# Altium PCB AVR-Connect.PcbDoc
Units mil, origin at the board's own origin, x right, y up, seen from the top; angles counter-clockwise.
Board outline 6000 x 4000 mil, 2 copper layers (Top Layer, Bottom Layer); 52 components, 46 nets, 218 pads, 42 vias.
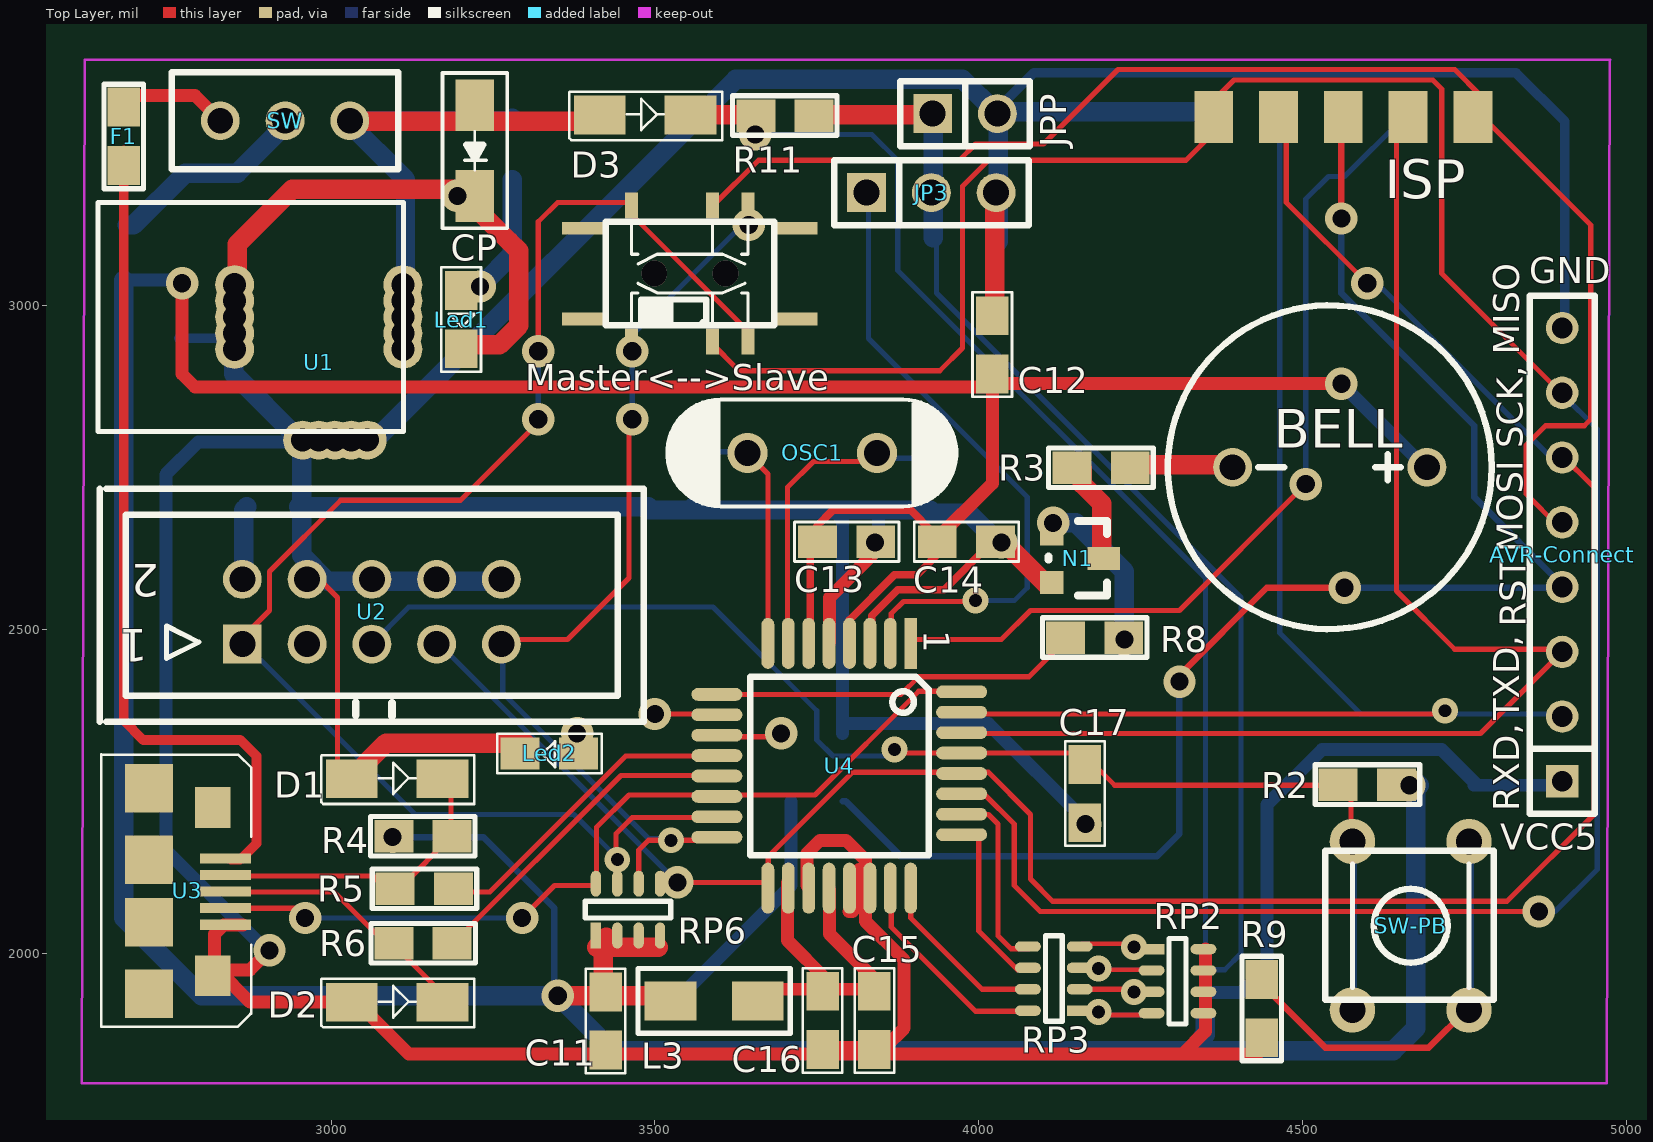
[diagram p0: Top Layer view]
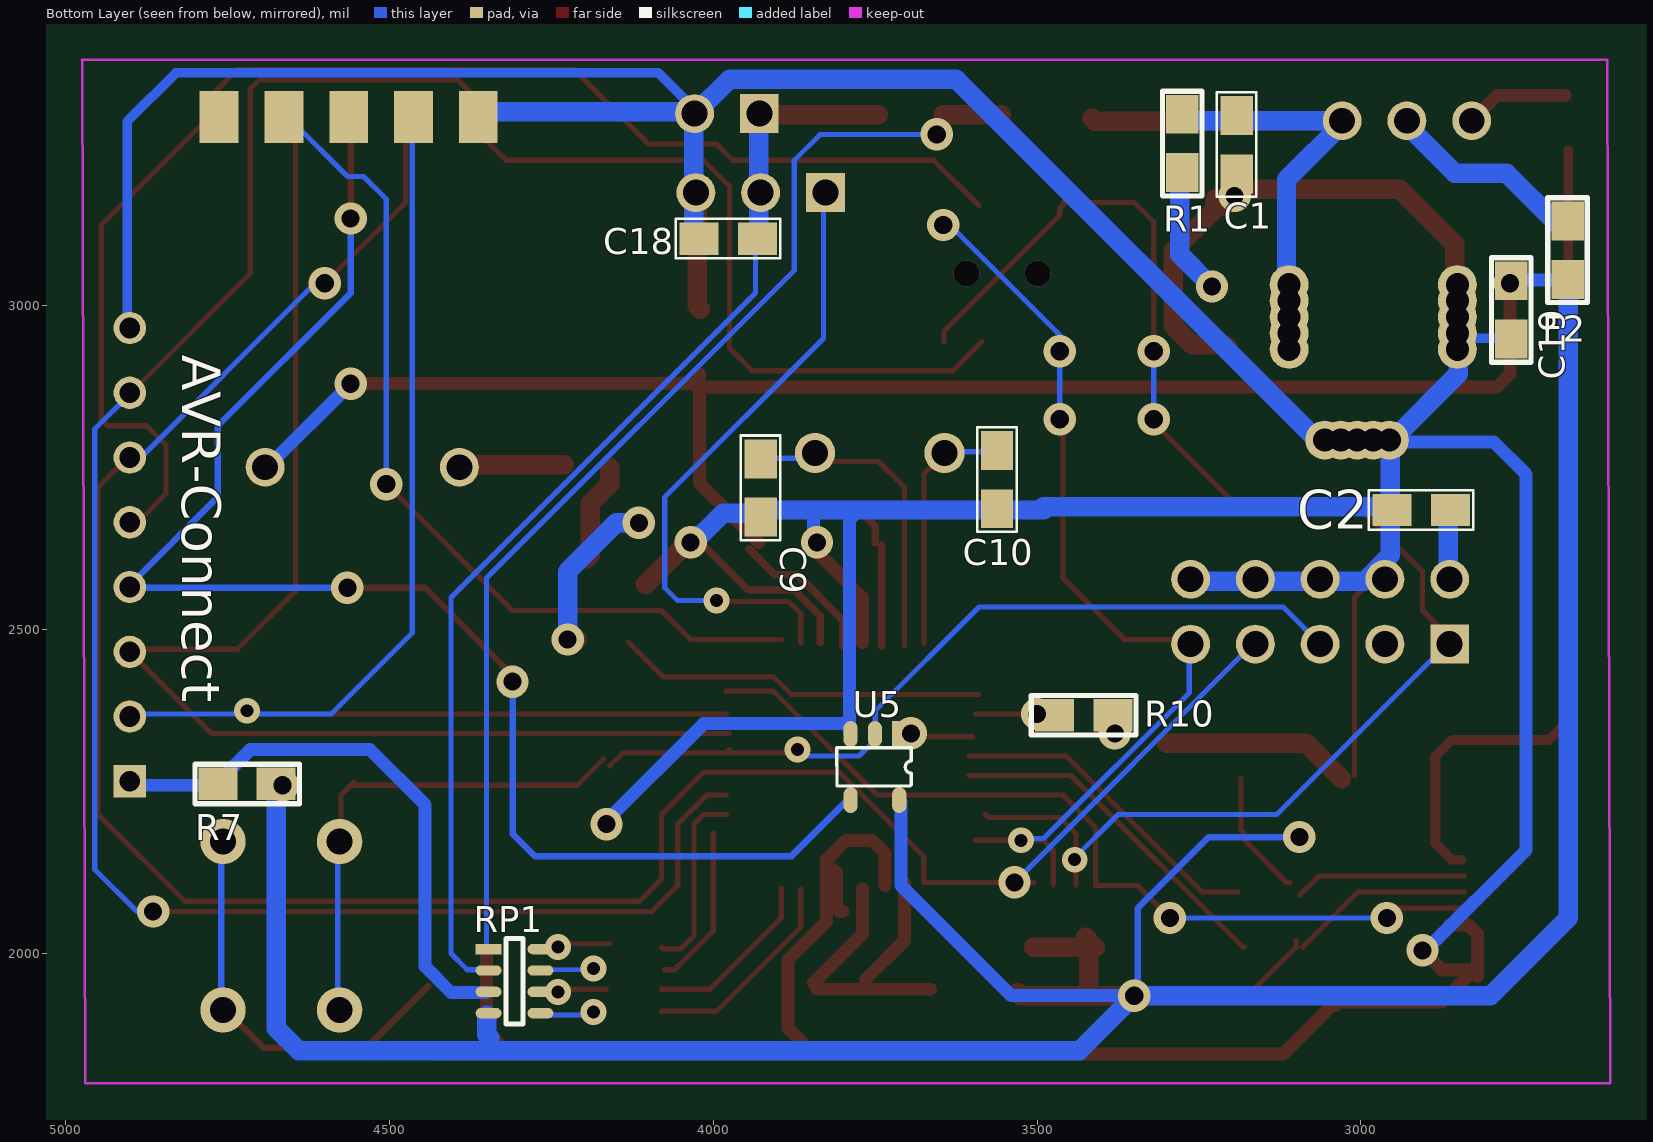
[diagram p1: Bottom Layer view, seen from below]

## Layer stack, top to bottom
Top Layer: signal copper 1.4
Dielectric: dielectric 12.6, FR-4, Dk 4.8
Bottom Layer: signal copper 1.4

## Board outline
1000,1000 7000,1000 7000,5000 1000,5000

## Design rules (kind name [scope] priority, off if disabled: settings)
Clearance [All] p1: gap=8
ComponentClearance [All] p1: gap=10 collisioncheckmode=3 verticalgap=10
PolygonConnect [All] p1: connectstyle=Relief reliefconductorwidth=10 reliefentries=4 polygonreliefangle="90 Angle"
RoutingVias [All] p1: holewidth=20 width=40 viastyle="Through Hole" minholewidth=20 minwidth=40 maxholewidth=28 maxwidth=50
SolderMaskExpansion [All] p1: expansion=4
TestPointUsage [All] p1: valid=0 allowmultiple=FALSE
Testpoint [All] p1: side=15 testpointundercomponent=TRUE minsize=40 maxsize=100 preferedsize=60 minholesize=0 maxholesize=40 preferedholesize=32 testpointgrid=1 style=1023 order=0123456789
Width [All] p1: maxlimit=40 minlimit=6 preferedwidth=10 toplayer_prefwidth=8 bottomlayer_prefwidth=8 minimp=50.000000 maximp=50.000000 favimp=50.000000
18 further rules are at their usual default settings.

## Components (designator, comment, footprint, x,y, rotation, side; value= is the part's Value field where it differs from the comment)
AVR-Connect "8PIN" SIP8 4901,2266 r90 top
BELL "BELL" Bell 4692,2751 r180 top
C1 "0.1u" RC100 3202,3214 r90 bottom
C2 "0.1u" RC100 2872,2675 r0 bottom
C9 "22pf" RC100 3937,2684 r90 bottom
C10 "22pf" RC100 3572,2697 r90 bottom
C11 "10u" RC100 3434,1931 r270 top
C12 "0.1u" RC100 4011,2905 r90 top
C13 "0.1u" RC100 3761,2646 r0 top
C14 "10u" RC100 3946,2646 r0 top
C15 "0.1u" RC100 3849,1932 r270 top
C16 "0.1u" RC100 3769,1932 r270 top
C17 "CAPA" RC100 4154,2212 r90 top
C18 "0.1u" RC100 3942,3094 r0 bottom
C19 "10u" 0805 2763,2989 r90 bottom
CP "100u" CP+140 3222,3310 r270 top
D1 "3.6V" DC140 3172,2181 r180 top
D2 "3.6V" DC140 3172,1836 r180 top
D3 "4148" DC140 3555,3206 r180 top
F1 "350mA" 0805 2685,3257 r90 top
F2 "FUSE" 0805 2686,3091 r270 bottom
ISP "SPI" DOWNLOAD-RC 4866,3390 r0 top
JP3 "3PIN" SIP3 3827,3175 r0 top
JPP "2PIN" SIP2 3929,3297 r0 top
L3 "LH" 1206 3524,1927 r0 top
Led1 "LED" LED 3286,2974 r270 top
Led2 "LED" LED 3332,2224 r180 top
Master<-->Slave "SW-DPDT" SW-DPDT 3589,3155 r180 top
N1 "NPN-A" SOT-23A 4113,2648 r270 top
OSC1 "12MHz" OSC200 3643,2773 r180 top
R1 "2K" 0805 3271,3246 r90 bottom
R2 "10K" 0805 4605,2266 r180 top
R3 "RES2A" 0805 4184,2745 r0 top
R4 "2.2K" 0805 3137,2176 r0 top
R5 "68" 0805 3149,2105 r180 top
R6 "68" 0805 3147,2021 r180 top
R7 "1" 0805 4715,2267 r0 bottom
R8 "RES2A" 0805 4184,2493 r180 top
R9 "RES2A" 0805 4432,1920 r270 top
R10 "RES2A" 0805 3433,2363 r180 bottom
R11 "1" 0805 3696,3289 r0 top
RP1 "RESPACK4" RN4 4347,2007 r180 bottom
RP2 "RESPACK4" RN4 4267,2007 r0 top
RP3 "RESPACK4" RN4 4156,1912 r180 top
RP6 "10K" RN4 3409,2028 r90 top
SW "SW-SPDT" SW-SPDT 2929,3286 r0 top
SW-PB "SW-PB" SW-PB 4577,2173 r0 top
U1 "POWER" POWER-L 3111,2983 r90 top
U2 "DOWNLOAD_SPI" DOWNLOAD 2863,2478 r180 top
U3 "USB-MICRO" USB-MICRO-R 2837,2147 r270 top
U4 "ATMEGA8_TQFP32" TQFP-32 3895,2479 r270 top
U5 "74AHCIG08" SOP-5 3713,2339 r270 bottom

## Footprints (in the part's own frame and the unit in brackets; to place one, negate y for a bottom-side part, rotate by r counter-clockwise, add the part's x,y. Pads: shape width x height; smd on the part's side, far side on the other; paste and mask are expansions set on the pad)
0805 [mil]
  rect 60x50 smd: 1(50,5) 2(-40,5)
  silkscreen extent -76,-26 85,36
1206 [mil]
  rect 80x60 smd: 1(0,0) 2(135,0)
  silkscreen extent -50,-50 185,50
Bell [mil]
  round 60 hole 40: 1(0,0) 2(300,0)
  silkscreen extent -100,-250 400,250
CP+140 [mil]
  rect 80x60 smd: 1(0,0) 2(140,0)
  silkscreen extent -50,-50 190,50
DC140 [mil]
  rect 80x60 smd: A(140,-89) K(0,-89)
  silkscreen extent -49,-125 187,-50
DOWNLOAD [mil]
  rect 60x60 hole 40: 1(0,0)
  round 60 hole 40: 2(0,-100) 3(-100,0) 4(-100,-100) 5(-200,0) 6(-200,-100) 7(-300,0) 8(-300,-100) 9(-400,0) 10(-400,-100)
  silkscreen extent -620,-240 220,120
DOWNLOAD-RC [mil]
  rect 60x80 smd: 1(-103,-98) 3(-203,-98) 5(-303,-98) 7(-403,-98) 9(-503,-98)
  rect 60x80 smd far side: 2(-103,-98) 4(-203,-98) 6(-303,-98) 8(-403,-98) 10(-503,-98)
LED [mil]
  rect 60x50 smd: A(-50,-85) K(40,-85)
  silkscreen extent -86,-116 75,-54
OSC200 [mil]
  round 62 hole 40: 1(0,0) 2(-200,0)
  silkscreen extent -323,-83 124,83
POWER-L [mil]
  round 60 hole 36: 1(-50,0) 1(-25,0) 1(0,0) 1(25,0) 1(50,0) 2(-190,55) 2(-190,80) 2(-190,105) 2(-190,130) 2(-190,155) 2(-50,260) 2(-25,260) 2(0,260) 2(25,260) 2(50,260)
  silkscreen extent -177,-1 177,471
RC100 [mil]
  rect 60x50 smd: 1(-10,-10) 2(80,-10)
  silkscreen extent -45,-41 116,21
RN4 [mil]
  rect 40x16 smd: 1(0,0)
  oval 40x16 smd: 2(0,-33) 3(0,-66) 4(0,-99) 5(80,-99) 6(80,-66) 7(80,-33) 8(80,0)
  silkscreen extent 27,-116 53,16
SIP2 [mil]
  rect 60x60 hole 40: 1(0,0)
  round 60 hole 40: 2(100,0)
  silkscreen extent -50,-50 150,50
SIP3 [mil]
  rect 60x60 hole 40: 1(0,0)
  round 60 hole 40: 2(100,0) 3(200,0)
  silkscreen extent -50,-50 250,50
SIP8 [mil]
  rect 50x50 hole 32: 1(0,0)
  round 50 hole 32: 2(100,0) 3(200,0) 4(300,0) 5(400,0) 6(500,0) 7(600,0) 8(700,0)
  silkscreen extent -50,-50 750,50
SOP-5 [mil]
  rect 40x22 smd: 1(0,0)
  oval 40x22 smd: 2(0,-37.5) 3(0,-75) 4(102,-75) 5(102,0)
  silkscreen extent 21,-96 80,19
SOT-23A [mil]
  rect 36x36 smd: B(0,0) E(75,0)
  rect 36x50 smd: C(38,80)
  silkscreen extent -20,-5 95,85
SW-DPDT [mil]
  rect 65x20 smd: 0(-130,175) 0(-130,35) 0(200,175) 0(200,35)
  rect 20x40 smd: 1(0,0) 2(-55,0) 3(125,0) 4(0,210) 5(-55,210) 6(125,210)
  silkscreen extent -95,25 165,185
SW-PB [mil]
  round 70 hole 40: 1(0,0) 2(180,0) 3(0,-260) 4(180,-260)
  silkscreen extent -42,-244 218,-14
SW-SPDT [mil]
  round 60 hole 40: 1(-100,0) 2(0,0) 3(100,0)
  silkscreen extent -175,-75 175,75
TQFP-32 [mm]
  rect 2x0.5 smd: 1(0,0)
  oval 2x0.5 smd: 2(0,-0.8) 3(0,-1.6) 4(0,-2.4) 5(0,-3.2) 6(0,-4) 7(0,-4.8) 8(0,-5.6) 17(9.6,-5.6) 18(9.6,-4.8) 19(9.6,-4) 20(9.6,-3.2) 21(9.6,-2.4) 22(9.6,-1.6) 23(9.6,-0.8) 24(9.6,0)
  oval 0.5x2 smd: 9(2,-7.6) 10(2.8,-7.6) 11(3.6,-7.6) 12(4.4,-7.6) 13(5.2,-7.6) 14(6,-7.6) 15(6.8,-7.6) 16(7.6,-7.6) 25(7.5,2) 26(6.7,2) 27(5.9,2) 28(5.1,2) 29(4.3,2) 30(3.5,2) 31(2.7,2) 32(1.9,2)
  silkscreen extent 1.3,-6.3 8.3,0.7
USB-MICRO-R [mm]
  rect 0.4x2 smd: 1(0,0) 2(0.65,0) 3(1.3,0) 4(1.95,0) 5(2.6,0)
  rect 1.6x1.4 smd: 6(4.6,-0.5) 11(-2,-0.5)
  rect 1.9x1.9 smd: 7(5.3,-3) 8(2.5,-3) 9(0.05,-3) 10(-2.75,-3)
  silkscreen extent -4.09,-4.88 6.6,1.02

## Part data
C1 C2 C9 C10 C11 C12 C13 C14 C15 C16 C18 C19: library part CAPA
CP: library part CAP+
D1 D2 D3: library part DIODE
F1: library part FUSE
OSC1: library part CRYSTAL
R1 R2 R4 R5 R6 R7 R11: library part RES2A
RP6: library part RESPACK4
U4: "Atmel Microcontroller - Library created by carel..  <www.mpfreezone.com>"

## Via types
v1: diameter 50, hole 28, Top Layer to Bottom Layer, 31 vias
v2: diameter 40, hole 20, Top Layer to Bottom Layer, 9 vias
v3: diameter 40, hole 40, Top Layer to Bottom Layer, 2 vias

## Nets (pads, with @x,y where several pads share a name; then routed paths per layer and width w, separated by ;. In a path a pad name is that pad's centre, name@x,y a point inside that pad or via, vN(x,y) a via of type N, cw(c..) or ccw(c..) an arc to the next point about the centre after c; other vN are vias at no path point)
ADR3: ISP.4 U4.1 | length 1347.7
  Top Layer w8: U4.1@3895,2485 4035,2485 4080,2530 4310,2530 v1@4502.5,2722.5
  Bottom Layer w8: v1(4505,2725) 4505,3165 4540,3200 4565,3200 ISP.4@4655,3290
AVCC: C15.1 C16.1 L3.2 U4.18 U4.20 | length 525.9
  Top Layer w20: L3.2@3665,1945 C15.1@3840,1945 ; U4.18@3705,2110 3705,2020 C16.1@3765,1960 ; U4.20@3770,2100 3770,2030 C15.1@3845,1955
BELL: R8.1 U4.9 | length 573.1
  Top Layer w8: U4.9@3590,2400 3879.75,2400 3907.38,2427.63 4077.63,2427.63 R8.1@4130,2480
D1+: R6.2 U4.13 | length 534.8
  Top Layer w8: R6.2@3180,2010 3182.63,2010 3447.63,2275 U4.13@3605,2275
D1-: R5.2 U4.12 | length 502
  Top Layer w8: R5.2@3190,2095 3245,2095 3455,2305 U4.12@3605,2305
GND: AVR-Connect.8 C1.1 C2.2 C9.1 C10.1 C11.2 C12.2 C13.2 C14.2 C15.2 C16.2 C17.1 C18.2 C19.2 CP.2 D1.A D2.A ISP.10 JP3.3 JPP.2 Led1.K Led2.K N1.E R9.1 RP2.5 RP2.6 RP2.7 RP2.8 U1.2 U2.4 U2.6 U2.8 U2.10 U3.5 U3.6 U4.3 U4.5 U4.19 U4.21 U4.22 U5.3 | length 11864.1
  Top Layer w8: U2.4@2975,2585 3010,2550 D1.A@3010,2275
  Top Layer w12: U4.3@3835,2480 3835,2521.72 3875,2561.72 3946.72,2561.72 C14.2@4020,2635
  Top Layer w20: U3.6@2820,1965 2820,2030 2834.35,2044.35 U3.5@2864.35,2044.35 ; U3.6@2820,1975 2875,1975 v1@2900,2000 ; U3.6@2825,1975 2875,1925 D2.A@3035,1925 ; D2.A@3040,1920 3045,1920 3120,1845 4430,1845 R9.1@4435,1850 ; U4.19@3735,2105 3735,2155 3755,2175 3795,2175 3825,2145 3825,2050 3885,1990 3885,1885 3855,1855 3760,1855 C16.2@3755,1850 ; U4.5@3770,2480 3770,2550 C13.2@3845,2625 ; U4.21@3800,2065 3805,2065 3810,2070 3810,2125 3815,2130 ; 4315,1845 4350,1880 RP2.8@4350,2007
  Top Layer w30: U1.2@2850,2940 2855,2945 2855,3095 2940,3180 3190,3180 CP.2@3205,3165 ; D1.A@3030,2270 3085,2325 Led2.K@3300,2325 ; Led1.K@3205,2935 3210,2940 3260,2940 3290,2970 3290,3085 3275,3100 3225,3150 CP.2@3225,3165 ; CP.2@3210,3155 CP.2@3215,3160 ; C12.2@4020,2995 4025,3000 JP3.3@4025,3175 ; C14.2@4030,2635 4040,2635 N1.E@4105,2570
  Bottom Layer w15: C19.2@2765,2950 U1.2@2845,2950 ; JPP.2@4025,3300 4085,3360 4830,3360 4905,3285 AVR-Connect.8@4905,2965
  Bottom Layer w20: v1@2900,2005 2745,2160 2745,2740 2795,2790 U1.2@2955,2790 ; 3775,2685 3790,2670 U5.3@3790,2340 ; U5.3@3790,2355 4015,2355 v1@4165,2205 ; 3835,2685 3845,2675 v1@3845,2635 ; v1@4160,2200 v1@4165,2195
  Bottom Layer w30: U1.2@2850,3035 2850,2895 U1.2@2950,2795 ; C2.2@2950,2690 3490,2690 ; U1.2@2955,2795 2955,2615 2995,2575 U2.10@3265,2575 ; U1.2@3010,2790 3065,2790 3625,3350 3975,3350 JPP.2@4025,3300 ; 3490,2685 3925,2685 C9.1@3930,2680 ; C10.1@3560,2690 C10.1@3565,2685 ; C9.1@3925,2680 3985,2680 v1@4035,2630 ; C18.2@4030,3100 JPP.2@4030,3310 ; JPP.2@4030,3300 ISP.10@4360,3300
  other v1: 2905,2005 4165,2200 3840,2635 4035,2635 3195,3170
LED: R10.2 U4.10 | length 97.1
  Top Layer w8: v1@3500,2375 3505,2370 U4.10@3595,2370
  other v1: 3500,2370
MISO: Master<-->Slave.2 Master<-->Slave.6 RP6.6 U2.9 U4.16 | length 1486.3
  Top Layer w6: RP6.6@3475,2105 RP6.6@3475,2110
  Top Layer w8: U2.9@3260,2485 3365,2485 3460,2580 3460,2830 v1@3465,2835 ; Master<-->Slave.6@3460,2945 Master<-->Slave.6@3464,2941 ; RP6.6@3475,2110 3475,2160 3490,2175 U4.16@3595,2175
  Bottom Layer w8: U2.9@3265,2475 3265,2402.63 3490,2177.63 v2@3525,2177.63 ; v1(3465,2825) 3465,2955 v1@3640,3130
  other v1: 3465,2930 3645,3125
  other v2: 3525,2175
MOSI: Master<-->Slave.3 Master<-->Slave.5 RP6.7 U2.1 U4.15 | length 2339.5
  Top Layer w8: U2.1@2865,2480 2865,2490 2905,2530 2905,2590 3015,2700 3200,2700 v1@3325,2825 ; v1(3320,2930) 3320,3130 3350,3160 Master<-->Slave.3@3460,3160 ; RP6.7@3440,2105 3440,2185 3465,2210 3575,2210 U4.15@3580,2215 ; Master<-->Slave.3@3460,3155 3465,3150 3465,3140 3644,2961 Master<-->Slave.5
  Bottom Layer w8: U2.1@2865,2475 2870,2475 3130,2215 3375,2215 v2@3443.5,2146.5 ; v1(3320,2825) v1@3320,2935
  other v2: 3442,2145
MOTOR: JP3.1 U4.2 | length 989.6
  Top Layer w8: U4.2@3865,2480 3865,2525 3883.72,2543.72 v2@3995,2543.72
  Bottom Layer w8: JP3.1@3830,3170 3830,2950 4075,2705 4075,2565 4055,2545 3990,2545 v2@3985,2550
  other v2: 3995,2545
NetBELL_2: BELL.2 R3.1 | length 155
  Top Layer w30: R3.1@4230,2755 BELL.2@4385,2755
NetC2_1: C2.1 U2.2 | length 112.1
  Bottom Layer w30: U2.2@2865,2580 2865,2685 C2.1@2870,2690
NetC9_2: C9.2 OSC1.2 U4.7 | length 483.6
  Top Layer w8: U4.7@3705,2475 3705,2720 3745,2760 3835,2760 OSC1.2@3840,2765
  Bottom Layer w8: OSC1.2@3845,2765 C9.2@3930,2765
NetC10_2: C10.2 OSC1.1 U4.8 | length 397.4
  Top Layer w8: OSC1.1@3640,2775 3674.53,2740.47 U4.8
  Bottom Layer w8: C10.2@3555,2780 3560,2775 OSC1.1@3640,2775
NetD1_K: D1.K R4.1 R5.1 U3.2 | length 451.4
  Top Layer w8: U3.2@2840,2120 3065,2120 R5.1@3095,2090 ; R5.1@3110,2110 3115,2110 R4.1@3180,2175 ; R4.1@3180,2185 3185,2190 D1.K@3185,2270
NetD2_K: D2.K R6.1 U3.3 | length 401.3
  Top Layer w8: U3.3@2840,2095 3005,2095 R6.1@3090,2010 ; R6.1@3100,2020 3100,2010 D2.K@3175,1935
NetF1_2: F1.2 U3.1 | length 1293.1
  Top Layer w15: F1.2@2680,3240 2680,2360 2710,2330 2860,2330 2885,2305 2885,2170 2860,2145 U3.1@2845,2145
NetF2_2: F2.2 SW.2 | length 309.2
  Bottom Layer w30: F2.2@2685,3125 2695,3125 2775,3205 2855,3205 SW.2@2930,3280
NetLed1_A: Led1.A R1.2 | length 178.6
  Bottom Layer w30: v1@3235,3035 3280,3080 R1.2@3280,3195
  other v1: 3230,3030
NetLed2_A: Led2.A R10.1
  other v1: 3380,2340
NetN1_B: N1.B R8.2 | length 248.1
  Top Layer w30: R8.2@4210,2485 R8.2@4215,2480
  Bottom Layer w30: v1(4115,2665) 4150,2665 4225,2590 v1@4225,2490
  other v1: 4225,2485
NetN1_C: N1.C R3.2 | length 154.5
  Top Layer w30: R3.2@4160,2750 4160,2725 4190,2695 4190,2615 N1.C@4195,2610
NetR9_2: R9.2 SW-PB.2 SW-PB.4 | length 631.3
  Top Layer w10: R9.2@4440,1950 4535,1855 4695,1855 SW-PB.4@4755,1915
  Bottom Layer w10: SW-PB.2@4760,2170 4760,1925 SW-PB.4@4765,1920
NRST: C17.2 R2.1 SW-PB.1 SW-PB.3 U2.5 U4.29 U5.2 | length 2026.7
  Top Layer w8: U2.5@3065,2470 U2.5@3065,2480 ; v2@3875,2310 U4.29@3975,2310 ; U4.29@3975,2315 3980,2310 4140,2310 C17.2@4160,2290 ; C17.2@4170,2300 4210,2260 R2.1@4555,2260 ; R2.1@4555,2265 4575,2245 SW-PB.1@4575,2170
  Bottom Layer w8: U2.5@3060,2475 3120,2535 3590,2535 3750,2375 3750,2330 3775,2305 v2@3865,2305 ; SW-PB.3@4580,1910 SW-PB.1@4580,2175
  other v2: 3870,2315
RESET: U4.11 U5.1 | length 85
  Top Layer w8: U4.11@3600,2335 v1@3685,2335
  other v1: 3695,2340
RXD: AVR-Connect.2 ISP.8 U4.31 | length 2018.8
  Top Layer w8: U4.31@3980,2370 v2@4720,2370
  Bottom Layer w8: ISP.8@4465,3280 4465,2495 4590,2370 4900,2370 AVR-Connect.2@4905,2365
  other v2: 4720,2375
S1: RP1.8 RP2.1 RP3.4 | length 75
  Top Layer w7: RP3.4@4160,2015 v2@4235,2015
  other v2: 4240,2010
S2: RP1.7 RP2.2 RP3.3 | length 165
  Top Layer w7: v2@4185,1975 RP2.2@4270,1975
  Bottom Layer w7: v2@4185,1975 RP1.7@4265,1975
  other v2: 4185,1977
S3: RP1.6 RP2.3 RP3.2 | length 75
  Top Layer w8: RP3.2@4165,1945 v2@4240,1945
  other v2: 4240,1941
S4: RP1.5 RP2.4 RP3.1 | length 155
  Top Layer w8: v2@4195,1905 RP2.4@4270,1905
  Bottom Layer w8: v2@4190,1905 RP1.5@4270,1905
  other v2: 4185,1910
SAMP1: RP3.8 U4.23 | length 328.2
  Top Layer w8: U4.23@3865,2100 3865,2041.11 3995,1911.11 4078.89,1911.11 RP3.8@4080,1910
SAMP2: RP3.7 U4.24 | length 276.6
  Top Layer w8: U4.24 3895,2055 4005,1945 RP3.7@4080,1945
SAMP3: RP3.6 U4.25 | length 249.9
  Top Layer w8: U4.25@4000,2185 4000,2035 4060,1975 RP3.6@4075,1975
SAMP4: RP3.5 U4.26 | length 287.9
  Top Layer w8: U4.26@3980,2215 4015,2215 4030,2200 4030,2027.63 4050,2007.63 4077.63,2007.63 RP3.5@4080,2010
SCK: AVR-Connect.6 ISP.7 RP6.5 U2.7 U4.17 U4.28 | length 3547.8
  Top Layer w8: RP6.5@3505,2110 3675,2110 3675,2150 3805,2280 4015,2280 4080,2215 4080,2115 4114,2081 4816,2081 4950,2215 4950,2720 AVR-Connect.6@4900,2770 ; ISP.7@4475,3285 4475,3160 v1(4600,3035) ; v1@4604.68,3023.21 v1@4604.78,3028.12
  Bottom Layer w8: U2.7@3160,2480 3165,2480 v1(3535,2110) ; v1@4600,3030 4620,3030 AVR-Connect.6@4890,2760
TMISO: AVR-Connect.7 ISP.9 Master<-->Slave.4 U4.27 | length 3909.8
  Top Layer w8: Master<-->Slave.4@3585,2945 3630,2900 3940,2900 3975,2935 3975,3185 4015,3225 4320,3225 ISP.9@4365,3270 ; U4.27@3980,2245 4010,2245 4055,2200 4055,2105 4095,2065 v1@4860,2065 ; ISP.9@4355,3285 ISP.9@4355,3290 ; ISP.9@4360,3315 4394,3349 4701,3349 4715,3335 4715,3050 4895,2870 AVR-Connect.7@4900,2870 ; AVR-Connect.7@4895,2865 AVR-Connect.7@4900,2860
  Bottom Layer w8: v1@4870,2065 4890,2065 4955,2130 4955,2810 AVR-Connect.7@4900,2865
  other v1: 4865,2065
TMOSI: AVR-Connect.5 ISP.1 Master<-->Slave.1 | length 2098.3
  Top Layer w8: Master<-->Slave.1@3590,3155 3660,3225 3970,3225 3995,3250 4100,3250 4215,3365 4735,3365 ISP.1@4775,3325 ; ISP.1@4770,3300 4945,3125 4945,2825 4935,2815 4875,2815 4845,2785 4845,2710 AVR-Connect.5@4895,2660
TRST: AVR-Connect.4 ISP.5 U5.4 | length 2356.7
  Top Layer w10: v1(4310,2420) 4310,2430 4445,2565 v1(4565,2565) ; v1@4310,2425 v1@4315,2425 ; ISP.5@4560,3285 v1(4560,3135) v1@4565,3130 ; AVR-Connect.4@4890.96,2565 AVR-Connect.4@4895,2565 ; AVR-Connect.4@4900,2560 AVR-Connect.4@4905,2565
  Bottom Layer w10: U5.4@3790,2235 3795,2235 3880,2150 4275,2150 4310,2185 v1(4310,2420) ; v1(4560,3135) v1@4570,3135 ; v1@4560,3140 4560,3020 4765,2815 4765,2705 AVR-Connect.4@4905,2565 ; v1@4570,2565 AVR-Connect.4@4900,2565
TVCC: AVR-Connect.1 R7.1 RP1.3 | length 881.6
  Bottom Layer w20: RP1.3@4350,1940 4405,1940 4445,1980 4445,2230 4530,2315 4715,2315 R7.1@4770,2260 ; R7.1@4765,2260 4895,2260 AVR-Connect.1@4900,2265
TXD: AVR-Connect.3 ISP.3 U4.30 | length 2001.1
  Top Layer w8: U4.30@3975,2340 4775,2340 4900,2465 4895,2470 4735,2470 4645,2560 ISP.3@4645,3290
USB-ID: RP6.8 U3.4 U4.14 U4.32 | length 1348.9
  Top Layer w8: U3.4@2835,2070 2945,2070 v1(2960,2055) ; v1(3295,2055) 3345,2105 3410,2105 3410,2195 3460,2245 3747.37,2245 3907.37,2405 U4.32@3980,2405
  Bottom Layer w8: v1(2960,2055) v1(3295,2055)
VBUS: F1.1 SW.1 | length 161.6
  Top Layer w20: F1.1@2685,3325 2790,3325 SW.1@2830,3285
VCC: BELL.1 C11.1 C12.1 C13.1 C14.1 C19.1 F2.1 L3.1 R2.2 R4.2 R7.2 RP1.4 RP6.1 RP6.2 RP6.3 RP6.4 U4.4 U4.6 U5.5 | length 7974.1
  Top Layer w12: U4.6@3740,2475 C13.1@3740,2630 ; C13.1@3750,2635 3750,2660 3775,2685 3895,2685 C14.1@3930,2650 ; U4.4@3800,2475 3800,2515 3870,2585 3905,2585 C14.1@3945,2625
  Top Layer w20: v1(2770,3035) 2770,2895 2790,2875 C12.1@4025,2875 ; C14.1@3930,2635 4021,2726 C12.1 ; C12.1@4020,2880 v1@4555,2880
  Top Layer w30: v1(3350,1935) L3.1@3524,1935 ; RP6.1@3410,2010 RP6.4@3505,2010 ; C11.1@3420,1940 3420,2020 3425,2025 ; L3.1@3525,1935 L3.1@3530,1940
  Bottom Layer w10: v1@3100,2180 3235,2180 3345,2070 3345,1945 v1@3350,1940
  Bottom Layer w20: F2.1@2680,3040 C19.1@2770,3040 ; v1@3355,1935 3540,1935 3710,2105 U5.5@3710,2235 ; v1(4560,2880) BELL.1@4690,2750
  Bottom Layer w30: F2.1@2680,3040 2680,2055 2800,1935 v1(3350,1935) 3435,1850 4640,1850 4675,1885 R7.2 ; 4345,1870 4350,1875 RP1.4@4350,1905 ; R7.2@4670,2260 R7.2@4675,2255 ; R7.2@4675,2265 R7.2@4680,2260
  other v1: 3095,2180 4665,2260
VP: C18.1 JP3.2 JPP.1 R11.1 RP1.2 | length 1752.1
  Top Layer w30: R11.1@3745,3295 JPP.1@3935,3295
  Bottom Layer w8: C18.1@3935,3105 3935,3020 4405,2550 4405,2000 4380,1975 RP1.2@4350,1975
  Bottom Layer w30: JP3.2@3925,3170 JP3.2@3930,3175 ; C18.1@3930,3105 JPP.1@3930,3295
VPOWER: C1.2 CP.1 D3.A R1.1 SW.3 U1.1 | length 1032
  Top Layer w30: SW.3@3030,3285 3410,3285 D3.A@3415,3290
  Bottom Layer w30: SW.3@3025,3285 3115,3195 U1.1@3115,2930 ; SW.3 3276,3286 R1.1@3280,3290
VPR: D3.K R11.2 RP1.1 | length 1743.3
  Top Layer w30: D3.K R11.2@3645,3295
  Bottom Layer w8: v1(3655,3265) 3835,3265 3875,3225 3875,3055 4350,2580 RP1.1@4350,2005
pads on no net: ISP.2 ISP.6 Master<-->Slave.0 U2.3 U3.7 U3.8 U3.9 U3.10 U3.11
copper on no net:
  other v3: 3499,3050 3609,3050

## Keep-outs
Keep-Out Layer:
  lines w4: 2619.94,3379.97 2615.28,1800 4970,1800 4974.66,3380 ; 2620,3380 4975,3380

## Silkscreen, mask and mechanical layers (free items; w line width, h text height)
Top Overlay:
  text "GND" at 4850,3035 h40
  text "MISO" at 4835,2925 h40 r90
  text "SCK," at 4840,2780 h40 r90
  text "MOSI" at 4840,2620 h40 r90
  text "RST" at 4845,2505 h40 r90
  text "TXD," at 4835,2360 h40 r90
  text "RXD," at 4835,2220 h40 r90
  text "VCC5" at 4805,2160 h40

## Text inside footprints (layer, text, board x,y; h text height)
U2: Top Overlay "1" at 2717,2501 h50 r180; Top Overlay "2" at 2735,2601 h50 r180
U4: Top Overlay "1" at 3915,2499 h40 r270